# Altium PCB PowerController.PcbDoc
Units mm, origin at the board's own origin, x right, y up, seen from the top; angles counter-clockwise.
Board outline 80 x 50 mm, 2 copper layers (Top Layer, Bottom Layer); 3 components, 11 nets, 66 pads, 0 vias.
Unrouted connection lines stored in the file: 25.
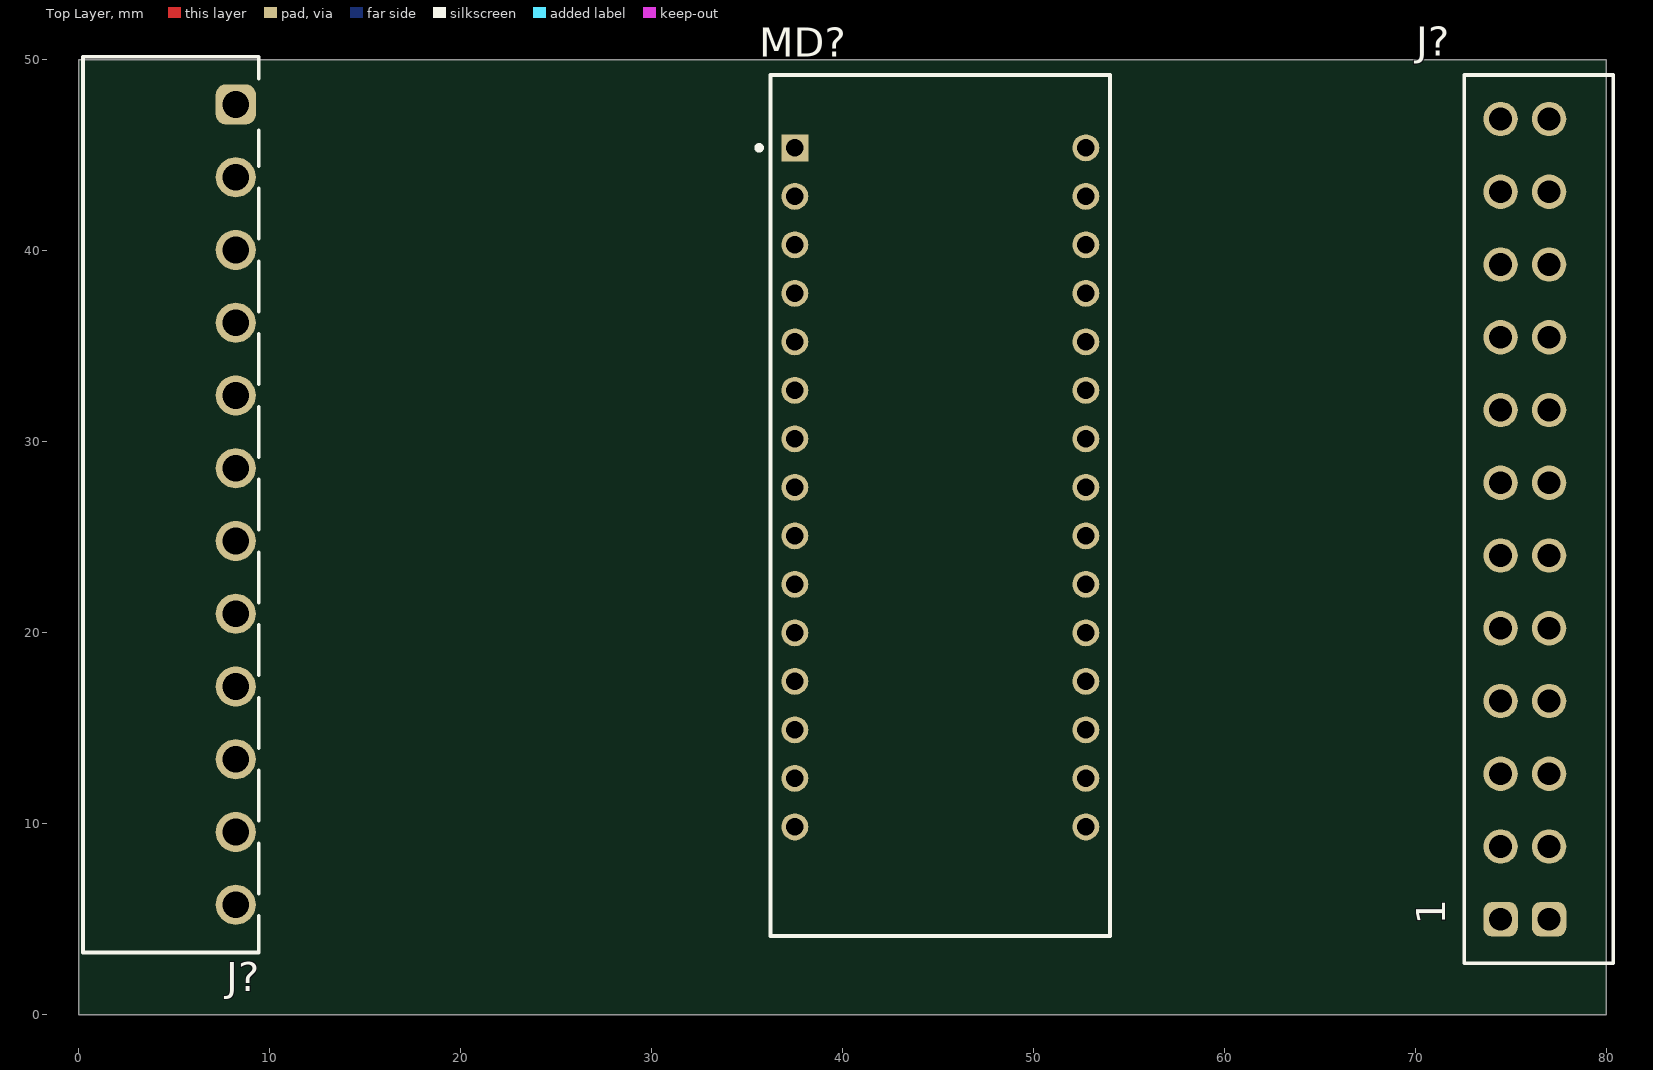
[diagram p0: Top Layer view]
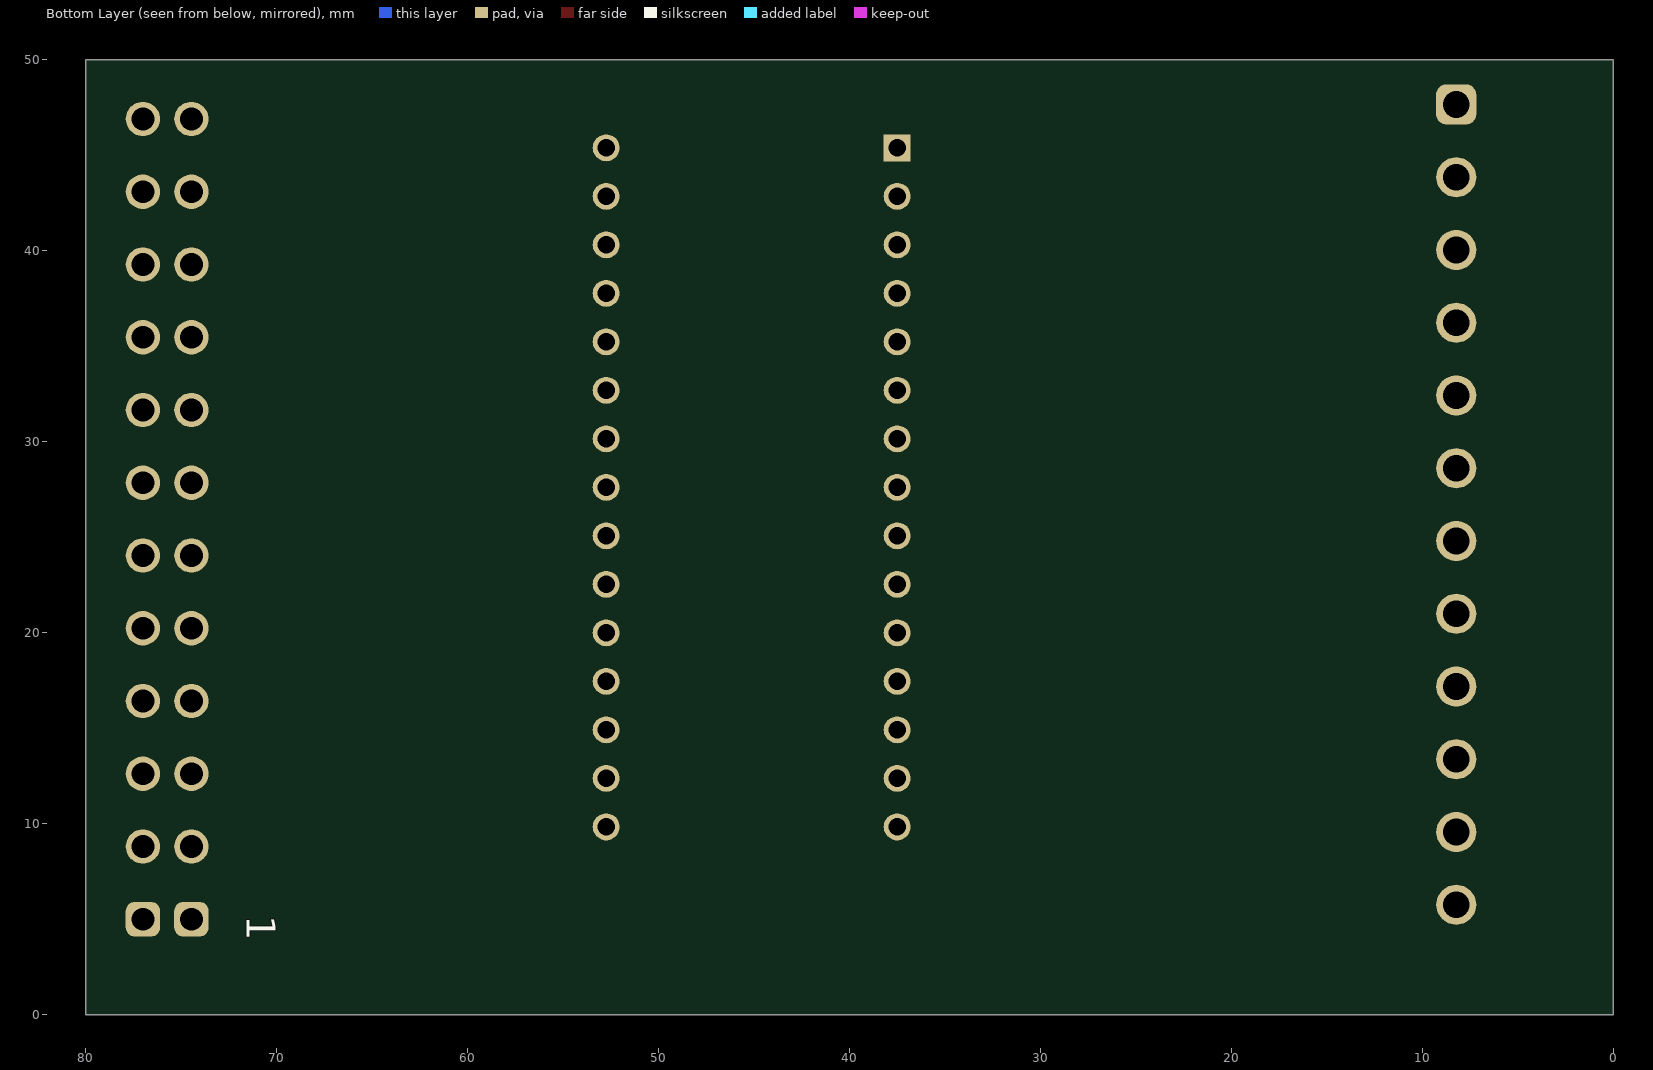
[diagram p1: Bottom Layer view, seen from below]

## Layer stack, top to bottom
Top Solder: solder mask 0.0102, Solder Resist, Dk 3.5
Top Layer: signal copper 0.0356
Dielectric 1: dielectric 0.32, FR-4, Dk 4.8
Bottom Layer: signal copper 0.0356
Bottom Solder: solder mask 0.0102, Solder Resist, Dk 3.5

## Board outline
0,0 0,50 80,50 80,0

## Design rules (kind name [scope] priority, off if disabled: settings)
Clearance [All] p1: gap=0.254 ignorepadtopadclearanceinfootprint=FALSE
PolygonConnect [All] p1: connectstyle=Relief reliefconductorwidth=0.254 reliefentries=4 polygonreliefangle="90 Angle" airgapwidth=0.254
RoutingVias [All] p1: holewidth=0.711 width=1.27 viastyle="Through Hole" minholewidth=0.711 minwidth=1.27 maxholewidth=0.711 maxwidth=1.27
SolderMaskExpansion [All] p1: expansion=0.102 istentingtop=FALSE
Width [All] p1: maxlimit=0.254 minlimit=0.254 preferedwidth=0.254
30 further rules are at their usual default settings.

## Classes and differential pairs
component class PC: J? MD?

## Components (designator, comment, footprint, x,y, rotation, side; value= is the part's Value field where it differs from the comment)
J? "691309310012" 691309310012 79.81,25.955 r90 top
J? "691322310012" 691322310012 4.825,26.715 r270 top
MD? "A000005" FP-A000005-MFG 45.12,26.668 r0 top

## Footprints (in the part's own frame and the unit in brackets; to place one, negate y for a bottom-side part, rotate by r counter-clockwise, add the part's x,y. Pads: shape width x height; smd on the part's side, far side on the other; paste and mask are expansions set on the pad)
691309310012 [mm] "Horizontal Reserved PCB Header, pitch 3.81mm, 12p"
  rrect50% 1.8x1.8 hole 1.2: 1A(-20.955,5.35) 1B(-20.955,2.81)
  round 1.8 hole 1.2: 2A(-17.145,5.35) 2B(-17.145,2.81) 3A(-13.335,5.35) 3B(-13.335,2.81) 4A(-9.525,5.35) 4B(-9.525,2.81) 5A(-5.715,5.35) 5B(-5.715,2.81) 6A(-1.905,5.35) 6B(-1.905,2.81) 7A(1.905,5.35) 7B(1.905,2.81) 8A(5.715,5.35) 8B(5.715,2.81) 9A(9.525,5.35) 9B(9.525,2.81) 10A(13.335,5.35) 10B(13.335,2.81) 11A(17.145,5.35) 11B(17.145,2.81) 12A(20.955,5.35) 12B(20.955,2.81)
  silkscreen extent -23.26,-0.55 23.26,7.25, body extent -23.01,-7.25 23.5,7.25, height 6.85
691322310012 [mm] "Horizontal PCB Header, pitch 3.81mm, 12p"
  rrect50% 2.1x2.1 hole 1.4: 1(-20.955,3.4)
  round 2.1 hole 1.4: 2(-17.145,3.4) 3(-13.335,3.4) 4(-9.525,3.4) 5(-5.715,3.4) 6(-1.905,3.4) 7(1.905,3.4) 8(5.715,3.4) 9(9.525,3.4) 10(13.335,3.4) 11(17.145,3.4) 12(20.955,3.4)
  silkscreen extent -23.45,-4.6 23.46,4.6, body extent -23.45,-4.6 23.45,4.6, height 7.25
FP-A000005-MFG [mil]
  rect 55.67x55.67 hole 35.98 paste-99999 mask+0: 1(-300,737.5)
  round 55.67 hole 35.98 paste-99999 mask+0: 2(-300,637.5) 3(-300,537.5) 4(-300,437.5) 5(-300,337.5) 6(-300,237.5) 7(-300,137.5) 8(-300,37.5) 9(-300,-62.5) 10(-300,-162.5) 11(-300,-262.5) 12(-300,-362.5) 13(-300,-462.5) 14(-300,-562.5) 15(-300,-662.5) 16(300,-662.5) 17(300,-562.5) 18(300,-462.5) 19(300,-362.5) 20(300,-262.5) 21(300,-162.5) 22(300,-62.5) 23(300,37.5) 24(300,137.5) 25(300,237.5) 26(300,337.5) 27(300,437.5) 28(300,537.5) 29(300,637.5) 30(300,737.5)
  silkscreen extent -379,-887 350,888, body extent -354,-891 354,891, height 10

## Part data
J?: library part CMP-002-00074-2, "Terminal Block, 3.81MM Pitch, Horizontal With Coding Finger, Tht, 12 Pins", Gender=Female, System=Connector
J?: library part CMP-002-00073-1, "Terminal Block, R/A Header, 12Pos, Th Rohs Compliant: Yes", Gender=Male, System=Connector
MD?: library part CMP-020-00023-1, "ATmega328 Microcontroller Development Board 16MHz CPU 2KB RAM 1KB/32KB EEPROM/Flash", Frequency=16MHz, Max Supply Voltage=12V, Min Supply Voltage=7V, Interface="I2C, SPI, USB"

## Nets (pads, with @x,y where several pads share a name; then routed paths per layer and width w, separated by ;. In a path a pad name is that pad's centre, name@x,y a point inside that pad or via, vN(x,y) a via of type N, cw(c..) or ccw(c..) an arc to the next point about the centre after c; other vN are vias at no path point)
+3V3: J?.3 J?.10A J?.10B
+12V: J?.1A J?.1B J?.12
GND: J?.1 J?.2A J?.2B J?.11 J?.12A J?.12B
IMot: J?.6 J?.7A J?.7B
PWMH: J?.5A J?.5B J?.8
PWML: J?.6A J?.6B J?.7
SCL: J?.4A J?.4B J?.9
SDA: J?.3A J?.3B J?.10
SLEEP: J?.4 J?.9A J?.9B
SPARE: J?.2 J?.11A J?.11B
VMot: J?.5 J?.8A J?.8B
pads on no net: MD?.1 MD?.2 MD?.3 MD?.4 MD?.5 MD?.6 MD?.7 MD?.8 MD?.9 MD?.10 MD?.11 MD?.12 MD?.13 MD?.14 MD?.15 MD?.16 MD?.17 MD?.18 MD?.19 MD?.20 MD?.21 MD?.22 MD?.23 MD?.24 MD?.25 MD?.26 MD?.27 MD?.28 MD?.29 MD?.30

## Text inside footprints (layer, text, board x,y; h text height)
J?: Top Overlay "1" at 71.556,4.709 h1.52 r90; Bottom Overlay "1" at 71.556,5.201 h1.52 r90